# Altium PCB Booster_Common_Channel_RF.PcbDoc (part 3 of 3)
Units mm, origin at the board's own origin, x right, y up, seen from the top; angles counter-clockwise.
Board outline 159.2 x 28.7 mm, 2 copper layers (Top Layer, Bottom Layer), stack 1.071 mm thick; 192 components, 112 nets, 503 pads, 509 vias.
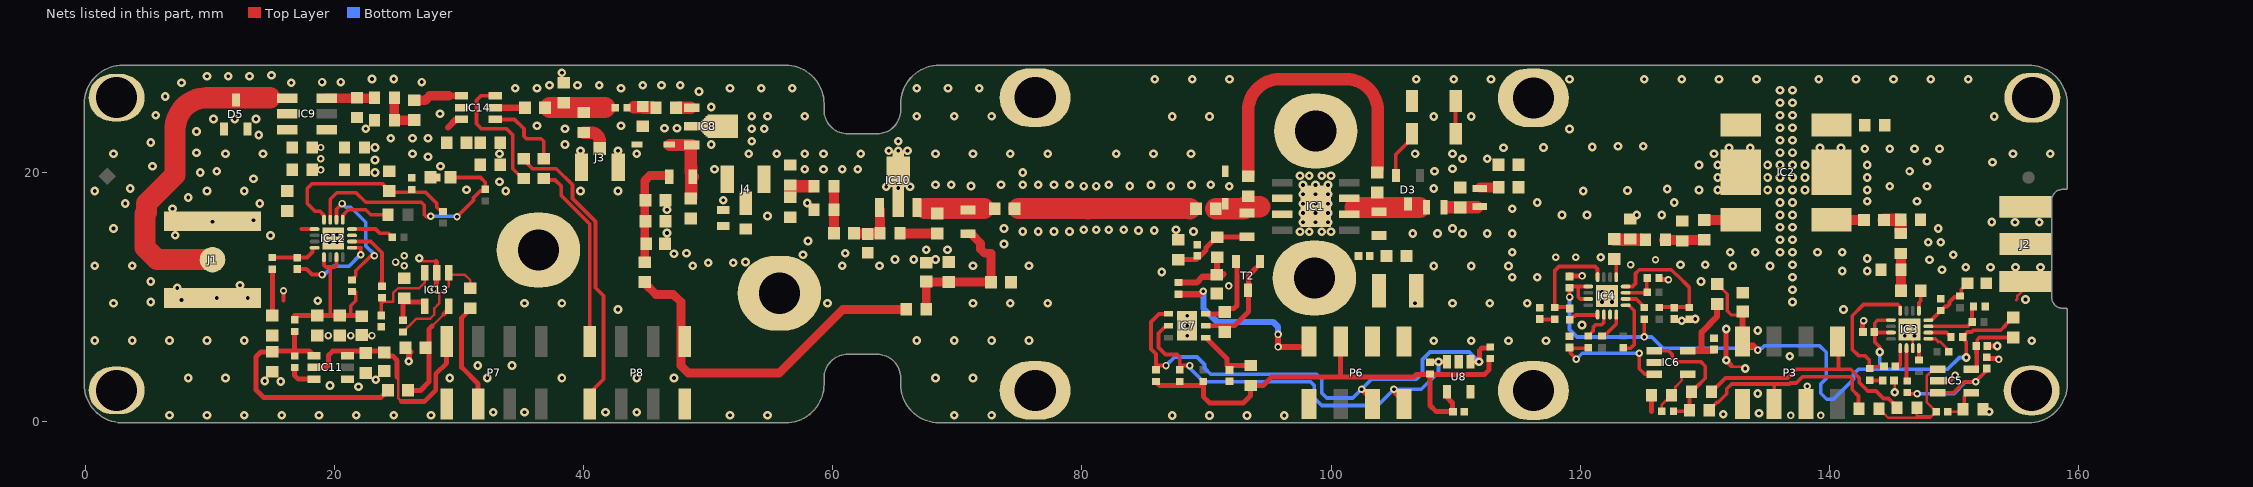
[diagram p2: the nets of this part, all layers, seen from the top]

## Via types
v1: diameter 0.7, hole 0.3, Top Layer to Bottom Layer, tented both sides, 449 vias
v2: diameter 0.6, hole 0.3, Top Layer to Bottom Layer, tented both sides, 60 vias

## Nets (pads, with @x,y where several pads share a name; then routed paths per layer and width w, separated by ;. In a path a pad name is that pad's centre, name@x,y a point inside that pad or via, vN(x,y) a via of type N, cw(c..) or ccw(c..) an arc to the next point about the centre after c; other vN are vias at no path point) (continued)
FWD_VRMS: P3.5 R17.2 R42.1 | length 17.4
  Top Layer w0.3: R17.2@130.372,0.866 130.447,0.941 R17.2@130.422,0.966 ; R17.2@130.372,0.916 130.977,1.521 131.09,1.521 131.77,2.2 131.77,2.603 132.165,2.998 135.488,2.998 ; P3.5@135.58,1.348 135.58,2.905 135.488,2.998 ; R42.1@142.35,0.968 142.35,2.033 141.85,2.533 141.85,3.397 141.674,3.572 137.854,3.572 137.35,3.068 136.89,3.068 136.82,2.998 135.488,2.998
GND: C2.1 C3.1 C4.1 C5.1 C6.1 C7.1 C8.1 C13.1 C14.1 C17.1 C18.1 C20.2 C21.1 C23.2 C24.1 C25.1 C26.1 C27.1 C29.1 C30.1 C31.1 C32.1 C33.1 C35.1 C36.1 C37.1 C43.1 C45.1 C46.1 C47.1 C51.2 C52.1 C53.1 C54.1 C55.1 C56.2 C57.1 C58.1 C59.1 C60.2 D1.1 D4.2 D5.1 D5.2 D6.1 IC1.9 IC2.2 IC2.3 IC2.6 IC2.7 IC3.11 IC3.17 IC4.11 IC4.17 IC5.2 IC6.2 IC7.2 IC7.7 IC8.2 IC9.2 IC10.2 IC10.4 IC11.1 IC12.11 IC12.17 IC13.2 IC14.2 J1.2 J2.2 J3.2 J4.2 L10.1 P3.3 P3.7 P6.7 P7.7 P8.1 pad.0 pad.1 pad.2 pad.3 pad.4 pad.5 pad.6 pad.7 R9.1 R13.1 R14.1 R15.1 R16.1 R21.1 R28.2 R31.1 R32.1 R40.2 R45.1 R46.1 R48.2 R49.2 R52.1 R53.1 R54.1 R56.2 R58.1 R59.1 R60.2 R61.2 R65.1 R68.1 R73.2 T2.1 T2.3 U8.2 U8.5 | length 28.6
  Top Layer w0.203: 27.039,12.83 28.148,12.83 28.15,12.828 ; 132.108,4.492 132.207,4.394 133.094,4.394 v1(133.25,4.238) ; v1(145.25,2.336) C20.2@145.25,3.268 ; IC3.11@146.7,5.918 IC3.17@146.7,7.118 ; 155,9.718 155.095,9.813 155.095,10.071 J2.2@155.75,10.725
  Top Layer w0.3: 15.9,9.678 v2(15.9,10.478)
  Top Layer w0.4: 28.148,10.978 28.2,11.03 28.2,12.778 28.15,12.828 ; IC7.2@89.95,7.668 92.25,7.668 93.379,8.797 93.379,11.697 93.65,11.968 93.65,11.985 94.283,12.618 T2.1@94.283,12.818 ; C17.1@119.15,11.768 119.25,11.668 v2(120.15,11.668) ; 125.73,0.773 R32.1@125.73,2.223 ; R9.1@126.281,11.498 126.411,11.368 v2(127.09,11.368) ; v1@131.75,7.438 v1(131.725,7.413) v1(131.725,4.899) 131.725,4.876 132.108,4.492 ; C14.1@142.65,7.168 142.65,7.968 v2(142.75,8.068) ; IC3.17@146.45,7.368 IC3.17@146.7,7.118 ; IC5.2@148.85,3.238 149.644,3.238 150.1,3.694 v2(150.097,3.694) ; C26.1@152.639,5.138 152.749,5.028 153.495,5.028 153.56,4.963 v2(153.61,4.963) ; C21.1@152.741,6.038 153.481,6.038 v1(153.491,6.048)
  Top Layer w0.5: v1(25.947,4.826) 25.985,4.864 25.985,5.453 C57.1@26.084,5.552
  other v1: 87.25,0.468 90.25,0.468 93.25,0.468 96.25,0.468 6.75,0.478 9.75,0.478 12.75,0.478 15.75,0.478 18.75,0.478 21.75,0.478 24.75,0.478 27.75,0.478 51.75,0.478 54.75,0.478 69.75,0.478 72.75,0.478 131.495,0.566 134.358,0.643 32.75,0.728 35.25,0.728 41.75,0.728 44.25,0.728 152.85,0.768 134.249,2.226 21.917,2.778 19.64,2.878 15.686,3.188 14.393,3.224 23.308,3.329 8.25,3.478 11.25,3.478 29.25,3.478 32.25,3.478 38.25,3.478 44.25,3.478 47.25,3.478 68.25,3.478 71.25,3.478 31.5,4.478 34.25,4.478 136.828,5.225 108.25,6.468 111.25,6.468 114.25,6.468 117.25,6.468 156.25,6.468 0.75,6.478 3.75,6.478 6.75,6.478 9.75,6.478 12.75,6.478 66.75,6.478 69.75,6.478 72.75,6.478 75.75,6.478 88.45,6.868 146.05,6.868 146.85,6.868 134.257,7.279 88.45,7.668 146.05,7.668 146.85,7.668 120.15,7.73 128.15,8.068 129.25,8.218 88.45,8.468 42.75,8.978 141.15,8.968 2.25,9.478 35.25,9.478 38.25,9.478 59.566,9.47 71.25,9.478 74.25,9.478 77.25,9.478 106.75,9.468 109.75,9.468 112.75,9.468 115.75,9.468 5.25,9.578 121.75,9.568 122.55,9.568 137.05,9.568 18.64,9.678 7.705,9.728 155.75,9.772 10.535,9.898 13.024,9.898 121.75,10.368 122.55,10.368 137.05,10.568 7.376,10.704 12.4,10.924 129.7,11.218 5.25,11.228 114.55,11.568 116.55,11.568 137.05,11.568 86.41,11.985 141.05,12.068 143.05,12.068 149.05,12.168 150.95,12.368 152.95,12.368 154.95,12.368 156.95,12.368 0.75,12.478 3.75,12.478 48.75,12.478 60.75,12.478 63.75,12.478 71.25,12.478 75.75,12.478 108.25,12.468 111.25,12.468 114.25,12.468 132.25,12.468 135.25,12.468 128.05,12.568 130.05,12.568 137.05,12.568 50,12.728 52,12.728 52.996,12.793 148.05,12.968 65,12.978 66.5,12.978 68.25,12.978 143.05,13.068 26.791,13.078 121.65,13.168 149.95,13.368 57.6,13.378 47.25,13.458 48.25,13.478 61,13.478 114.55,13.568 132.05,13.568 134.05,13.568 136.05,13.568 137.05,13.568 139.05,13.568 141.05,13.568 67.5,13.778 69.2,13.778 73.75,14.228 147.95,14.368 148.95,14.368 58,14.478 136.05,14.568 137.05,14.568 14.848,14.917 7.2,14.928 106.55,15.068 108.55,15.068 110.55,15.068 112.55,15.068 114.55,15.068 46.695,15.118 75.25,15.228 76.5,15.228 77.75,15.228 79,15.228 88.95,15.228 97.5,15.218 98.25,15.218 99.25,15.218 100,15.218 84.55,15.318 85.798,15.318 80.15,15.368 81.15,15.368 82.15,15.368 83.35,15.368 87.55,15.368 2.25,15.478 73.75,15.478 109.75,15.468 148.75,15.468 136.05,15.568 137.05,15.568 97.75,15.968 98.75,15.968 99.75,15.968 154.909,15.968 156.863,15.968 153.042,15.991 10.2,16.008 13.5,16.128 54.75,16.478 118.55,16.568 120.55,16.568 124.55,16.568 126.55,16.568 136.05,16.568 137.05,16.568 97.75,16.718 98.75,16.718 99.75,16.718 46.695,16.984 6.981,17.059 114.55,17.068 3.2,17.478 14,17.478 97.75,17.468 98.75,17.468 99.75,17.468 57.95,17.528 116.55,17.568 127.55,17.568 136.05,17.568 137.05,17.568 143.05,17.668 147.05,17.668 51.2,17.747 8.25,17.969 97.75,18.218 98.75,18.218 99.75,18.218 0.75,18.478 9.75,18.478 12.75,18.478 33.75,18.478 39.75,18.478 42.75,18.478 120.242,18.482 123.808,18.533 30.6,18.578 129.55,18.568 131.05,18.568 135.05,18.568 136.05,18.568 137.05,18.568 138.05,18.568 143.05,18.568 126.99,18.64 3.6,18.678 108.25,18.683 65.25,18.728 64.297,18.823 66.203,18.823 80.15,18.878 81.15,18.878 91.835,18.868 144.85,18.868 147.85,18.868 71.1,18.893 83.85,18.893 87.14,18.893 68.25,18.978 69.5,18.978 73.5,18.978 75.25,18.978 76.5,18.978 77.75,18.978 79,18.978 82.15,18.978 85.55,18.968 88.791,18.968 90.341,18.983 97.75,18.968 98.75,18.968 99.75,18.968 33.25,19.228 13.5,19.478 131.05,19.568 135.05,19.568 136.05,19.568 137.05,19.568 138.05,19.568 143.05,19.568 97.5,19.718 98.25,19.718 99.25,19.718 100,19.718 9.224,19.968 23.25,19.978 75.25,19.978 10.535,20.078 108.3,20.068 146.45,20.068 50.5,20.228 57.75,20.228 59.25,20.228 60.75,20.228 62,20.228 109.75,20.268 5.388,20.478 28.5,20.478 129.55,20.568 131.05,20.568 135.05,20.568 136.05,20.568 137.05,20.568 138.05,20.568 143.05,20.568 153.107,20.799 147.85,20.868 23.25,20.978 110.55,21.068 112.55,21.068 27.5,21.228 2.25,21.478 11.25,21.478 14.25,21.478 26.25,21.478 33.25,21.478 44.25,21.478 53.25,21.478 55.5,21.478 57.75,21.478 59.25,21.478 62.25,21.478 68.25,21.478 71.25,21.478 74.25,21.478 77.25,21.478 82.75,21.468 85.75,21.468 88.75,21.468 106.75,21.468 109.75,21.468 130.75,21.468 154.75,21.468 157.75,21.468 8.915,21.558 136.05,21.568 137.05,21.568 39.75,21.728 42.75,21.728 64.5,21.728 65.25,21.728 66,21.728 142.85,21.868 144.85,21.868 146.85,21.868 148.85,21.868 23.25,21.978 113.85,21.968 117.049,21.983 131.95,21.968 133.65,21.968 139.25,21.968 140.95,21.968 120.97,22.015 123.032,22.07 125.058,22.07 38.5,22.228 50.25,22.228 5.25,22.378 53.5,22.478 65.25,22.478 136.05,22.568 137.05,22.568 24.5,22.728 26.25,22.728 27.5,22.728 13.913,22.978 8.915,23.258 22.5,23.478 38.5,23.478 53.5,23.478 54.5,23.478 119.15,23.468 46.487,23.522 47.5,23.528 136.05,23.568 137.05,23.568 36.25,23.728 43,23.728 50.25,23.728 10.286,24.263 11.986,24.263 13.686,24.263 87.25,24.468 90.25,24.468 108.25,24.468 111.25,24.468 153.25,24.468 53.5,24.478 54.75,24.478 57.75,24.478 66.75,24.478 69.75,24.478 72.75,24.478 5.641,24.557 136.05,24.568 137.05,24.568 28.466,24.678 50.25,25.228 136.05,25.568 137.05,25.568 6.407,26.075 49.25,26.478 136.05,26.568 137.05,26.568 34.5,26.728 36.25,26.728 43,26.728 51.75,26.728 54.25,26.728 56.75,26.728 66.75,26.728 69.25,26.728 71.75,26.728 37.25,26.978 39.5,26.978 41.25,26.978 44.75,26.978 46.25,26.978 47.75,26.978 7.705,27.172 16.526,27.185 19,27.228 20.5,27.228 27,27.228 85.85,27.468 88.85,27.468 91.85,27.468 106.85,27.468 109.85,27.468 112.85,27.468 119.15,27.468 125.15,27.468 128.15,27.468 131.15,27.468 134.15,27.468 139.15,27.468 142.15,27.468 145.15,27.468 148.15,27.468 151.15,27.468 23,27.478 24.75,27.478 9.764,27.693 11.464,27.693 13.164,27.693 14.929,27.776 38.25,27.978
  other v2: 136.912,0.468 139.31,0.468 138.24,2.808 19.5,6.878 21.3,6.878 23,6.878 28,10.612 91.798,10.868 25.6,12.478 124.05,12.568 24.9,12.778 126.05,12.968 118.05,13.168 119.65,13.168 25.6,13.278 19.6,14.378 20.2,14.378 19.6,14.978 20.2,14.978 18.9,20.178 18.9,21.078 18.9,21.978
NetC1_1: C1.1 R5.2 | length 23
  Top Layer w1: R5.2@93.35,19.868 93.35,24.928 cw(c95.89,24.928) 95.89,27.468 101.21,27.468 cw(c101.21,24.928) 103.75,24.928 C1.1@103.75,20.268
NetC1_2: C1.2 D3.3 IC1.6 IC1.7 L3.1 L6.1 | length 5.2
  Top Layer w1.7: 101.95,17.172 103.85,17.172 106.18,17.172 107.114,17.172
NetC2_2: C2.2 R1.1 R4.1 | length 5.3
  Top Layer w0.5: R1.1@87.75,11.138 89.215,11.138 89.67,11.593 91.125,11.593 91.35,11.818 ; C2.2@90.819,11.768 90.834,11.784 90.834,13.152 R4.1@90.85,13.168
NetC3_2: C3.2 C4.2 L2.1 R4.2 | length 6.1
  Top Layer w0.4: C4.2@87.75,12.968 C3.2@89.207,12.968 ; C3.2@89.384,13.145 89.967,13.728 89.967,13.935 R4.2@90.8,14.768 ; R4.2@90.85,14.768 90.875,14.793 93.225,14.793 L2.1@93.25,14.818
NetC9_1: C9.1 L7.2 | length 1.5
  Top Layer w0.8: L7.2@111.946,18.778 113.44,18.778 C9.1@113.45,18.768
NetC9_2: C9.2 C37.2 IC2.8
NetC10_1: C10.1 R10.2 R14.2 | length 2
  Top Layer w1: C10.1@144.383,16.168 R14.2@145.55,16.168 ; R10.2@145.75,15.268 R14.2@145.75,16.068
NetC10_2: C10.2 IC2.4 | length 2.3
  Top Layer w0.8: IC2.4@140.24,16.158 140.24,16.168 C10.2@142.531,16.168
NetC11_1: C11.1 R11.1 R15.2 | length 3.2
  Top Layer w0.8: R11.1@126.75,14.568 128.05,14.568 C11.1@129.95,14.568
NetC11_2: C11.2 IC2.5 | length 3
  Top Layer w0.8: C11.2@129.95,16.168 132.95,16.168 IC2.5@132.95,16.158
NetC12_1: C12.1 J2.1
NetC12_2: C12.2 IC2.1
NetC15_1: C15.1 IC3.1 | length 1.7
  Top Layer w0.3: IC3.1@147.2,8.818 147.2,9.518 147.35,9.668 C15.1@147.35,10.468
NetC15_2: C15.2 R10.1 R13.2 | length 3
  Top Layer w0.8: C15.2@145.75,10.468 R13.2@145.75,12.168 R10.1@145.75,13.468
NetC16_1: C16.1 IC4.1 | length 1.2
  Top Layer w0.3: C16.1@122.85,12.668 122.9,12.618 IC4.1@122.9,11.518
NetC16_2: C16.2 R11.2 R16.2 | length 2.1
  Top Layer w1: C16.2@122.732,14.574 124.012,14.574 R11.2@124.848,14.574
NetC19_1: C19.1 IC3.9 | length 1.6
  Top Layer w0.3: C19.1@145.55,4.368 145.7,4.518 IC3.9@145.7,5.918
NetC19_2: C19.2 IC3.4 R26.1 | length 10.9
  Top Layer w0.3: C19.2@144.35,4.368 143.218,4.368 143.218,4.899 142.85,5.268 142.35,5.268 141.85,5.768 141.85,8.468 142.75,9.368 145.5,9.368 145.7,9.168 145.7,8.818 IC3.4@145.7,8.618
NetC20_1: C20.1 R26.2 | length 0.8
  Top Layer w0.3: R26.2@143.45,3.268 C20.1@144.25,3.268
NetC21_2: C21.2 IC5.5 L1.1 | length 7.7
  Top Layer w0.3: IC5.5@151.4,4.188 IC5.5@151.72,4.188 ; IC5.5@151.65,4.118 IC5.5@151.72,4.188 ; C21.2@151.75,5.968 151.75,5.499 151.8,5.449 151.8,5.205 ; L1.1@154.754,6.728 154.744,6.718 152.051,6.718 151.875,6.542 151.875,5.968 151.875,5.499 151.875,5.205 ; IC5.5@151.72,4.188 151.725,4.188 151.875,4.338 151.875,5.205 ; IC5.5@151.72,4.188 151.8,4.268 151.8,5.205 ; 151.8,5.205 151.875,5.205
NetC22_1: C22.1 IC4.9 | length 2.4
  Top Layer w0.3: C22.1@119.156,8.158 119.443,8.446 119.591,8.446 119.672,8.527 IC4.9@121.4,8.527
NetC22_2: C22.2 IC4.4 R27.1 | length 8.5
  Top Layer w0.3: C22.2@119.15,9.168 117.95,9.168 117.95,12.068 118.3,12.418 121.2,12.418 121.4,12.218 IC4.4@121.4,11.518
NetC23_1: C23.1 R27.2 | length 1.2
  Top Layer w0.3: C23.1@116.75,8.168 R27.2@117.95,8.168
NetC24_2: C24.2 IC6.5 L4.1 | length 6.5
  Top Layer w0.5: IC6.5@128.5,5.668 129.75,5.668 ; C24.2@130.75,5.718 130.7,5.668 129.75,5.668 ; L4.1@130.996,9.408 130.996,8.424 130.4,7.828 130.4,7.796 129.75,7.146 129.75,5.668
NetC25_2: C25.2 IC4.16 R24.2 R28.1 | length 10.8
  Top Layer w0.3: IC4.16@123.6,10.818 124.2,10.818 124.45,11.068 124.45,11.868 124.75,12.168 127.319,12.168 127.719,11.768 127.75,11.768 128.75,10.768 128.75,9.168 127.55,9.168 R24.2@126.35,9.168
NetC26_2: C26.2 IC5.3 R29.1 | length 10.8
  Top Layer w0.3: R29.1@146.25,2.268 146.3,2.218 v2(147.05,2.218) ; IC5.3@148.7,2.288 149.982,2.288 150.862,3.168 v2(151.75,3.168) 151.75,3.185 152.639,4.075 C26.2@152.639,4.238
  Bottom Layer w0.3: v2(147.05,2.218) 150.015,2.218 150.965,3.168 v2(151.75,3.168)
NetC27_2: C27.2 IC6.3 R30.1 | length 10.7
  Top Layer w0.3: C27.2@119.15,5.868 R30.1@120.65,5.868 ; C27.2@119.15,5.918 119.232,5.836 119.232,5.458 v2(119.696,4.994) ; v2(124.75,5.468) 124.75,4.218 125.2,3.768 IC6.3@126.1,3.768
  Bottom Layer w0.3: v2(119.696,4.994) 120.17,5.468 v2(124.75,5.468)
NetC28_1: C28.1 R8.2 R46.2 | length 3.9
  Top Layer w1: 44.006,25.228 C28.1@45.506,25.228 ; R46.2@44.8,25.178 C28.1@45.6,25.178 ; R46.2@44.8,25.178 C28.1@45.6,25.178 ; R46.2@44.8,25.178 C28.1@45.6,25.178
NetC28_2: C28.2 IC8.1 | length 0.9
  Top Layer w1: C28.2@47.7,25.178 IC8.1@48.6,25.178
NetC29_2: C29.2 IC7.1 R33.1 | length 4.9
  Top Layer w0.4: IC7.1@89.95,6.728 91.65,5.028 91.65,4.468 R33.1@93.55,4.468
NetC30_2: C30.2 IC3.16 R20.2 R40.1 | length 4.9
  Top Layer w0.3: IC3.16@147.9,8.118 IC3.16@147.95,8.118 148.2,8.118 R40.1@149.05,8.968 ; R40.1@148.95,8.968 R40.1@149.05,8.968 ; R20.2@150.45,10.057 150.45,9.968 150.05,9.968 149.653,9.571 149.653,9.422 149.446,9.215 149.297,9.215 R40.1@149.05,8.968 ; R20.2@150.5,10.057 150.598,10.155 150.598,10.575 C30.2@151.1,11.078
NetC31_2: C31.2 C32.2 C33.2 L8.2 L9.1 | length 8.7
  Top Layer w0.7: L8.2@44.896,12.768 44.896,14.978 44.896,16.778 44.896,17.743 44.896,18.243 44.896,19.318 45.306,19.728 L9.1@46.86,19.728
NetC34_1: C34.1 R47.2 R49.1 | length 3.4
  Top Layer w0.76: R47.2@24.8,25.978 R49.1@24.8,24.178 C34.1@26.4,24.178
NetC34_2: C34.2 IC14.1 | length 3.5
  Top Layer w0.5: 29.15,26.128 IC14.1@30.2,26.128
  Top Layer w0.76: C34.2@26.8,25.778 27.289,25.778 27.639,26.128 29.15,26.128
NetC35_2: C35.2 IC7.3 T2.2 | length 6.3
  Top Layer w0.4: IC7.3@89.95,8.608 C35.2@91.45,8.608 ; C35.2@91.45,8.768 91.725,9.043 92.201,9.043 92.45,9.292 92.45,12.751 T2.2@92.383,12.818
NetC36_2: C36.2 L6.2 L7.1 | length 2.4
  Top Layer w1: L6.2@109.34,17.172 110.146,17.172 110.15,17.168 110.154,17.172 L7.1@111.75,17.172
NetC38_1: C38.1 D1.2 IC1.2 IC1.3 L2.2 R5.1 | length 3.6
  Top Layer w1.7: C38.1@90.75,17.068 91.25,17.068 93,17.068 93.15,17.218 94.275,17.218
NetC38_2: C38.2 C50.2 | length 19.4
  Top Layer w1.7: C50.2@74.9,17.078 77.7,17.078 ; 80.5,17.068 76.3,17.078 88.65,17.068
NetC39_1: C39.1 IC14.5 | length 2.5
  Top Layer w0.3: C39.1@35.25,25.128 C39.1@35.3,25.178
  Top Layer w0.5: IC14.5@32.9,25.178 C39.1@35.3,25.178
NetC39_2: C39.2 R8.1 R45.2 R50.2 | length 4.4
  Top Layer w1.7: C39.2@37.3,25.178 41.7,25.178
NetC40_1: C40.1 D6.2 IC8.3 L9.2 | length 6.2
  Top Layer w1: D6.2@46.921,22.178 IC8.3@48.675,22.178 ; L9.2@48.6,19.978 IC8.3@48.6,21.978 ; C40.1@48.65,17.928 48.65,19.528 48.75,19.628 L9.2@48.76,19.628 ; L9.2@48.65,19.728 48.65,20.378
NetC40_2: C40.2 C41.1 L10.2 R51.2
NetC41_2: C41.2 R57.1 R60.1 | length 2.3
  Top Layer w1: C41.2@56.6,18.228 56.6,18.878 R57.1@58.25,18.878
NetC42_1: C42.1 R52.2 R56.1
NetC42_2: C42.2 IC14.3 | length 1.4
  Top Layer w0.5: 29.1,23.578 29.75,24.228 IC14.3@30.2,24.228
NetC43_2: C43.2 C49.2 IC10.1 R55.1 | length 4
  Top Layer w0.8: C49.2@61.7,15.078 62.8,15.078 R55.1@63.8,15.078 IC10.1@63.8,16.978
NetC44_1: C44.1 R55.2 | length 3
  Top Layer w0.8: R55.2@65.4,15.078 C44.1@68.4,15.078
NetC44_2: C44.2 C50.1 IC10.3 L5.2 | length 4.7
  Top Layer w1.7: 67.4,17.078 72.137,17.078
NetC45_2: C45.2 C46.2 C47.2 L5.1 L11.1 | length 12.5
  Top Layer w0.7: L11.1@67.51,8.974 67.5,8.984 67.5,11.178 C46.2@69.3,11.178 C45.2@72.7,11.178 72.7,13.478 72.209,13.478 71.862,13.825 71.862,14.295 71.104,15.053 L5.1@70.854,15.053
NetC48_1: C48.1 IC12.1 | length 1.1
  Top Layer w0.3: 17.35,15.428 IC12.1@18.45,15.428
NetC48_2: C48.2 IC9.1 R58.2 R59.2
NetC49_1: C49.1 R57.2 R61.1 | length 3.8
  Top Layer w0.8: C49.1@60.1,15.078 R57.2@60.1,18.878
NetC56_1: C56.1 IC12.15 R65.2 R66.2 | length 20.2
  Top Layer w0.3: IC12.15@19.65,16.128 IC12.15@19.65,16.178 19.65,17.828 20.175,18.353 21.725,18.353 22.5,17.578 26.954,17.578 27.196,17.336 27.196,16.608 27.378,16.426 27.692,16.426 v2(27.718,16.452) v2@27.744,16.478 ; C56.1@29.3,19.578 31.717,19.578 32.1,19.194 R66.2@32.1,18.628 31.96,18.488 31.694,18.488 31.15,17.944 31.15,17.747 v2(29.829,16.426)
  Bottom Layer w0.3: v2(27.718,16.452) 29.803,16.452 v2(29.829,16.426)
NetC57_2: C57.2 IC13.5 L12.1 | length 8.9
  Top Layer w0.2: 27.841,7.644 28.824,8.628 28.8,8.628
  Top Layer w0.4: L12.1@25.91,2.474 26.895,2.474 27.579,3.159 27.579,4.028 27.579,7.368 27.572,7.376 27.841,7.644 ; 28.8,8.628 29.15,8.978 IC13.5@29.15,9.378
NetC58_2: C58.2 IC12.16 R69.2 R73.1 | length 15.2
  Top Layer w0.3: IC12.16@19.15,16.128 IC12.16@19.15,16.178 19.15,16.528 18.825,16.853 18.425,16.853 17.8,17.478 17.8,18.678 18.2,19.078 23.8,19.078 C58.2@24.4,18.478 ; C58.2@24.4,18.378 27.309,18.378 28.209,17.478 28.209,17.179 R69.2@28.455,16.933
NetC59_2: C59.2 IC13.3 R74.1 | length 6.3
  Top Layer w0.2: 23.8,9.578 24.7,9.578 24.7,10.285 25.093,10.678 26.787,10.678 27.25,11.141 IC13.3@27.25,11.778
  Top Layer w0.3: C59.2@23.75,8.478 C59.2@23.75,8.488 23.75,9.528 23.8,9.578
  Top Layer w0.4: 23.793,9.578 23.8,9.578
NetC60_1: C60.1 R75.1 | length 3.4
  Top Layer w0.4: C60.1@15,8.478 15,11.878
NetC61_1: C61.1 IC12.9 | length 7.3
  Top Layer w0.3: C61.1@17,12.228 17.735,12.228 18.185,11.778 v2(19,11.778) ; IC12.9@21.35,13.928 22.15,13.928 22.1,13.878 v2(22.1,13.378)
  Bottom Layer w0.3: v2(19,11.778) 19.2,11.778 19.869,12.447 21.15,12.447 22.081,13.378 v2(22.1,13.378)
NetC61_2: C61.2 IC12.4 R75.2 | length 4
  Top Layer w0.3: R75.2@15,13.148 17.788,13.148 18.235,13.595 18.235,13.928 IC12.4@18.4,13.928 IC12.4@18.45,13.928
NetD2_1: D2.1 D3.2 | length 3.8
  Top Layer w0.3: D3.2@105.202,19.857 105.202,21.41 105.721,21.928 106.5,22.708 D2.1@106.5,23.083
NetD2_2: D2.2 D4.1 | length 2.6
  Top Layer w0.3: D2.2@110,23.083 D4.1@110,25.718
NetD5_3: D5.3 IC9.3 J1.1 | length 25.4
  Top Layer w1.7: J1.1@10.2,12.978 5.741,12.978 4.778,13.941 4.778,16.652 4.9,16.774 4.9,17.478 7.2,19.778 7.2,23.438 cw(c9.74,23.438) 9.74,25.978 12.074,25.978 14.817,25.978
NetIC3_10: IC3.10 R29.2 | length 2.7
  Top Layer w0.3: R29.2@146.2,3.268 IC3.10@146.2,5.918 ; R29.2@146.25,3.268 R29.2@146.3,3.318
NetIC3_12: IC3.12 R25.2 | length 1
  Top Layer w0.3: IC3.12@147.2,5.918 147.2,5.118 R25.2@147.35,4.968
NetIC3_13: IC3.13 R38.2 | length 2.2
  Top Layer w0.203: 148.741,6.377 148.923,6.377 149.411,5.889 149.411,5.766 R38.2@149.599,5.578
  Top Layer w0.3: IC3.13@147.9,6.618 148.5,6.618 148.741,6.377
NetIC3_14: IC3.14 R18.2 | length 1.7
  Top Layer w0.3: IC3.14@147.9,7.118 149.4,7.118 R18.2@149.55,6.968
NetIC3_15: IC3.15 R7.1 R21.2 | length 4.8
  Top Layer w0.3: IC3.15@147.9,7.618 151.1,7.618 151.45,7.968 151.45,9.028 R21.2@151.49,9.068
NetIC4_10: IC4.10 R30.2 | length 2.6
  Top Layer w0.3: R30.2@120.65,6.868 120.7,6.868 120.81,6.978 120.81,7.028 121.06,7.278 121.06,7.567 121.236,7.743 121.724,7.743 121.9,7.919 IC4.10@121.9,8.618
NetIC4_12: IC4.12 R37.2 | length 2.2
  Top Layer w0.3: R37.2@121.85,6.868 121.95,6.868 122.9,7.818 IC4.12@122.9,8.618
NetIC4_13: IC4.13 R39.2 | length 4.7
  Top Layer w0.3: R39.2@123.45,5.868 124.05,5.868 124.35,6.168 124.35,8.868 123.9,9.318 IC4.13@123.6,9.318
NetIC4_14: IC4.14 R19.1 | length 1.8
  Top Layer w0.3: IC4.14@123.6,9.818 124.5,9.818 R19.1@125.15,9.168
NetIC4_15: IC4.15 R2.1 R9.2 | length 2.8
  Top Layer w0.3: IC4.15@123.6,10.318 125.3,10.318 125.35,10.368 125.35,11.328 R9.2@125.39,11.368
NetIC5_1: IC5.1 R22.1 R41.2 R42.2 | length 12.5
  Top Layer w0.203: R42.2@143.985,1.02 143.985,0.97 144.333,0.622 144.383,0.622 144.737,0.268 148.08,0.268 148.222,0.41 ; R41.2@147.033,1.096 147.033,0.41 148.222,0.41 ; IC5.1@148.85,4.188 IC5.1@148.7,4.188 148.375,4.188 IC5.1@148.177,3.99 ; IC5.1@149.1,4.118 148.63,4.118 148.502,3.99 IC5.1@148.177,3.99 ; IC5.1@148.177,3.99 147.979,3.792 147.97,3.792 147.821,3.643 147.821,1.547 148.58,0.788 R22.1@148.58,0.768 148.58,0.748 148.392,0.56 148.372,0.56 148.222,0.41
NetIC5_4: IC5.4 R22.2 R31.2 | length 3.3
  Top Layer w0.203: R22.2@149.52,0.768 150.54,0.768 R31.2@150.741,0.969
  Top Layer w0.3: R31.2@150.829,0.969 150.829,1.962 150.925,2.058 150.925,2.138 151.005,2.218 IC5.4@151.65,2.218
NetIC6_1: IC6.1 R12.1 R17.1 R23.1 | length 10.5
  Top Layer w0.3: IC6.1@126.1,5.668 127.1,5.668 127.4,5.368 127.4,5.132 127.764,4.768 129.7,4.768 130.05,4.418 130.05,3.458 129.3,2.708 129.25,2.708 128.95,2.408 R12.1@128.95,2.358 128.772,2.18 R17.1@128.772,1.112 ; R23.1@127.486,0.8 128.706,0.8 R17.1@128.772,0.866 R17.1@128.772,1.112 ; R17.1@128.528,0.869 R17.1@128.772,1.112 ; R17.1@128.828,1.219 128.828,1.169 R17.1@128.772,1.112
NetIC6_4: IC6.4 R23.2 R32.2 | length 4.1
  Top Layer w0.203: R23.2@126.546,0.8 126.546,1.322 126.932,1.708 126.982,1.708 127.33,2.056 R32.2@127.33,2.106 127.647,2.422 127.647,2.765 128.175,3.293 128.175,3.57 128.374,3.768 IC6.4@128.65,3.768
  Top Layer w0.3: R32.2@127.03,2.106 R32.2@127.08,2.156
NetIC9_4: IC9.4 R47.1 R48.1 | length 3.8
  Top Layer w0.76: IC9.4@19.39,25.948 23.17,25.948 R47.1@23.2,25.978
NetIC9_6: IC9.6 R53.2 R54.2
NetIC11_6: IC11.6 R62.1 | length 2.4
  Top Layer w0.4: R62.1@16.8,4.308 16.8,3.659 17.083,3.376 IC11.6@18.35,3.376 IC11.6@18.4,3.376
NetIC12_10: IC12.10 R74.2 | length 5.2
  Top Layer w0.3: IC12.10@21.35,14.428 22.902,14.428 23.802,13.527 23.802,11.18 23.8,11.178 23.75,11.228
NetIC12_12: IC12.12 R71.2 | length 3.5
  Top Layer w0.3: IC12.12@21.35,15.428 IC12.12@21.4,15.428 23.294,15.428 23.618,15.104 24.305,15.104 R71.2@24.6,14.809
NetIC12_13: IC12.13 R72.1 | length 4.4
  Top Layer w0.3: IC12.13@20.65,16.128 20.65,16.528 21.1,16.978 22.5,16.978 22.9,16.578 R72.1@24.3,16.578
NetIC12_14: IC12.14 R64.2 | length 9.8
  Top Layer w0.3: IC12.14@20.15,16.128 20.15,17.028 v2(20.6,17.478) ; R64.2@21.4,11.378 21.7,11.678 21.7,12.078 22.9,13.278 v2(23.2,13.278)
  Bottom Layer w0.3: v2(20.6,17.478) 20.9,17.178 21.3,17.178 22.5,15.978 22.5,14.078 v2@23.2,13.378
NetIC13_1: IC13.1 R67.1 R70.1 | length 9.4
  Top Layer w0.2: R67.1@25.5,7.178 25.894,7.572 25.915,7.572 26.062,7.72 26.062,7.74 26.566,8.244 27.682,8.244 28,8.562 28,9.068 28.4,9.468 28.4,10.194 28.634,10.428 28.741,10.428 29.15,10.836 29.15,11.778 30.445,11.778 30.9,11.323 R70.1@30.9,10.678
NetIC13_4: IC13.4 R67.2 R68.2 | length 3
  Top Layer w0.4: 25.5,8.478 25.5,9.478 25.6,9.578 26.95,9.578 IC13.4@27.3,9.228
NetIC14_4: IC14.4 R44.1 | length 6
  Top Layer w0.3: IC14.4@32.9,24.228 34.45,24.228 35.2,23.478 35.2,22.878 35.4,22.678 36.6,22.678 36.8,22.478 R44.1@36.8,21.478
NetIC14_6: IC14.6 R43.1 | length 10.4
  Top Layer w0.3: IC14.6@32.5,26.128 31.75,26.128 31.4,25.778 31.4,23.878 31.8,23.478 33.8,23.478 34.3,22.978 34.3,20.278 R43.1@35.2,19.378
NetJ3_1: J3.1 R50.1 | length 2.1
  Top Layer w1: R50.1@40,23.178 40.6,23.178 cw(c40.6,22.478) 41.3,22.478 ; J3.1@41.3,21.903 J3.1@41.3,22.278
NetJ4_1: J4.1 R51.1
NetP7_5: P7.5 R70.2 | length 8.4
  Top Layer w0.4: R70.2@30.9,9.078 30.9,8.998 30.2,8.298 30.2,4.326 31.53,2.996 P7.5@31.53,1.478
OUT_BIAS: P6.8 R1.2 | length 14.4
  Top Layer w0.5: R1.2@87.75,10.198 89.485,10.198 89.723,10.436 v2(89.75,10.436) ; v2(95.75,6.968) v2(95.75,5.968) 97.44,5.968
  Bottom Layer w0.5: v2(89.75,10.436) 89.75,9.068 90.85,7.968 95.35,7.968 95.75,7.568 v2(95.75,6.968) v2(95.75,5.968)
P3V3: C13.2 P6.6 R3.1 R6.1 R33.2 R34.1 R35.1 R36.1 U8.4 | length 39.2
  Top Layer w0.4: R35.1@85.95,3.168 86.25,2.868 89.75,2.868 89.75,1.968 90.25,1.468 92.95,1.468 93.55,2.068 R33.2@93.55,2.868 94.55,2.868 95.25,3.568 100.75,3.568 ; P6.6@100.75,5.968 100.75,3.568 ; U8.4@109.3,2.368 109.3,1.918 109.75,1.468 109.75,0.768 108.45,0.768 107.95,1.268 R3.1@107.95,3.768 ; R6.1@112.775,5.028 112.699,4.953 112.699,4.138 112.329,3.768 R3.1@107.95,3.768 ; 100.75,3.568 106.65,3.568 106.85,3.768 R3.1@107.95,3.768
P3V3A: C51.1 IC11.4 L12.2 R62.2 R63.1 | length 20
  Top Layer w0.4: 16.8,6.878 16.8,5.628 15.05,5.628 C51.1@15,5.578 14.1,5.578 13.691,5.169 13.691,2.519 14.293,1.917 23.733,1.917 L12.2@24.29,2.474 ; 16.825,5.603 16.85,5.628 17.998,5.628 IC11.4@18.35,5.276
P3V3A1: C8.2 C14.2 C17.2 IC3.5 IC3.7 IC4.5 IC4.7 L1.2 L4.2 P3.8 R18.1 R19.2 | length 67.5
  Top Layer w0.254: L4.2@130.996,11.028 131.804,10.22 131.804,8.864 132.135,8.533 133.04,8.533 C8.2@133.05,8.543
  Top Layer w0.3: v2(119.15,9.968) C17.2@119.15,10.718 119.15,10.768 119.2,10.818 119.85,10.818 ; IC4.7@120.7,9.818 IC4.7@120.65,9.818 120,9.818 119.85,9.968 119.85,10.818 ; IC4.5@120.7,10.818 IC4.5@120.65,10.818 119.85,10.818 ; v2(125.15,6.768) R19.2@125.15,8.168 ; v1(144.05,5.568) 144.05,5.968 143.65,6.368 C14.2@143.65,7.168 ; IC3.7@145,7.118 IC3.7@144.95,7.118 143.7,7.118 C14.2@143.65,7.168 ; IC3.5@145,8.118 IC3.5@144.95,8.118 143.9,8.118 143.65,7.868 C14.2@143.65,7.168 ; R18.1@150.72,6.768 150.72,6.788 151.098,7.166 151.428,7.166 151.577,7.315 153.727,7.315 153.771,7.315 154.153,7.697 154.153,7.741 L1.2@154.75,8.338 ; R18.1@150.86,6.778 150.86,6.51 151,6.37 v1(151,5.118)
  Top Layer w0.5: C8.2@133.04,8.533 133.04,6.068 133.9,6.068 v2(134.25,5.718)
  Bottom Layer w0.3: v2(119.15,9.968) 119.15,7.368 119.75,6.768 v2(125.15,6.768) 125.75,6.768 126.65,5.868 134.599,5.868 134.799,6.068 139.226,6.068 139.75,5.544 139.75,3.427 139.31,2.987 139.31,2.247 139.789,1.768 140.35,1.768 141.95,3.368 141.95,3.768 142.35,4.168 144.05,4.168 ; v1(144.05,5.568) 144.05,4.168 ; v1(151,5.118) 150.45,5.118 149.5,4.168 144.05,4.168
P3V3ADL: C53.2 C54.2 C55.2 IC12.5 IC12.7 R63.2 R64.1 | length 13.9
  Top Layer w0.3: IC12.5@19.15,13.228 19.15,12.528 19.3,12.378 19.65,12.378 ; 19.7,8.478 19.65,8.528 19.65,12.378 ; IC12.7@20.15,13.228 20.15,12.528 20,12.378 19.65,12.378 ; 21.3,8.478 21.3,9.278 21.7,9.678 R64.1@21.7,10.378
  Top Layer w0.4: 16.8,8.478 C53.2@18.6,8.478 19.7,8.478 C54.2@20.4,8.478 21.3,8.478 C55.2@22.2,8.478
RET_VRMS: P3.2 R12.2 R41.1 | length 19.1
  Top Layer w0.3: R12.2@130.55,2.358 130.55,2.408 130.85,2.708 130.9,2.708 131.66,3.468 136.65,3.468 137.35,4.168 140.75,4.168 ; P3.2@140.66,6.068 140.75,5.978 140.75,4.168 ; R41.1@145.433,1.096 145.433,1.146 144.756,1.823 144.36,1.823 143.758,2.425 143.096,2.425 142.407,3.113 142.407,3.479 141.719,4.168 140.75,4.168
SCK: IC7.4 P6.3 R6.2 R35.2 U8.1 | length 40.1
  Top Layer w0.3: v2(86.75,4.468) 85.95,4.468 85.95,5.406 85.55,5.806 85.55,7.968 86.19,8.608 IC7.4@86.95,8.608
  Top Layer w0.4: v2@102.52,2.498 P6.3@103.45,1.568 ; U8.1@111.2,4.768 v1(111.875,4.768) 111.932,4.825 111.932,5.699 112.112,5.878 112.685,5.878 R6.2@112.775,5.968
  Bottom Layer w0.3: v2(86.75,4.468) 87.45,5.168 89.25,5.168 89.85,4.568 89.85,4.268 90.35,3.768 98.85,3.768 99.25,3.368 99.25,2.268 99.65,1.868 101.75,1.868 v2(102.45,2.568) 103.25,3.368 106.85,3.368 107.35,3.868 107.35,4.968 107.95,5.568 111.075,5.568 v1(111.875,4.768)
SDA: IC7.5 P6.1 R3.2 R34.2 U8.3 | length 32.6
  Top Layer w0.3: IC7.5@86.95,7.668 86.75,7.668 86.15,7.068 86.15,5.918 86.7,5.368 87.65,5.368 87.85,5.168 87.85,4.468 v2(88.65,4.468)
  Top Layer w0.4: v2(105.05,2.568) 105.06,2.558 105.06,2.358 P6.1@106.05,1.368 ; R3.2@107.95,4.768 v1(108.625,4.768) U8.3@109.3,4.768
  Bottom Layer w0.3: v2(88.65,4.468) 88.65,4.268 89.75,3.168 98.35,3.168 98.65,2.868 98.65,1.868 99.25,1.268 103.75,1.268 v2(105.05,2.568) 107.25,2.568 108.625,3.943 v1(108.625,4.768)
SW_RF_A: P8.8 R44.2 | length 15
  Top Layer w0.3: R44.2@36.8,19.378 37.7,19.378 38.2,18.878 38.2,18.132 40.49,15.842 P8.8@40.49,6.478
SW_RF_B: P8.7 R43.2 | length 23.8
  Top Layer w0.3: R43.2@35.2,21.078 35.45,20.828 35.45,20.726 35.898,20.278 37.8,20.278 39.098,18.98 39.098,17.874 40.942,16.029 40.942,10.726 41.6,10.068 41.6,3.378 40.49,2.268 P8.7@40.49,1.478
VCC_PREAMP: L8.1 L11.2 P8.2 | length 29.1
  Top Layer w0.7: L8.1@44.896,11.082 45.8,10.178 47.2,10.178 47.81,9.568 47.81,6.478 47.81,4.468 48.4,3.878 55.7,3.878 60.796,8.974 L11.2@65.89,8.974
VCC_PREAMP_1: C18.2 C52.2 IC11.3 IC11.5 P7.8 | length 18.9
  Top Layer w0.203: 25.017,3.559 25.1,3.477 25.1,1.854 25.376,1.578
  Top Layer w0.381: 25.376,1.578 27.2,1.578 28.122,2.5 28.122,3.8 28.99,4.668 P7.8@28.99,6.478
  Top Layer w0.4: IC11.5@18.4,4.326 19.347,4.326 19.5,4.479 19.5,5.278 19.85,5.628 22.5,5.628 23.95,5.628 24,5.578 24,5.553 24.3,5.253 24.66,5.253 25.017,4.896 25.017,3.559
VCC_PWRAMP: C5.2 C6.2 C7.2 L3.2 P6.2 P6.4
pads on no net: D3.1 FTG1.FTG2 FTG2.1 IC1.1 IC1.4 IC1.5 IC1.8 IC3.2 IC3.3 IC3.6 IC3.8 IC4.2 IC4.3 IC4.6 IC4.8 IC9.5 IC11.2 IC12.2 IC12.3 IC12.6 IC12.8 P7.2 P7.4 P8.3 P8.4 P8.5 P8.6

## Polygon pours and split planes (outlines as drawn)
GND on Bottom Layer "Bottom Layer-GND" (solid, remove dead copper, pour order 9): 79.5,-0.282 156,-0.282 ccw(c156,2.718) 159,2.718 159,8.968 158.75,8.968 cw(c158.75,9.968) 157.75,9.968 157.75,16.968 cw(c158.75,16.968) 158.75,17.968 159,17.968 159,25.718 ccw(c156,25.718) 156,28.718 79.5,28.718 ccw(c79.49,28.718) 79.49,28.728 ccw(c79.49,28.718) 79.49,28.728 68.55,28.728 ccw(c68.55,25.478) 65.3,25.478 65.3,24.978 cw(c63.55,24.978) 63.55,23.228 61.2,23.228 cw(c61.2,24.978) 59.45,24.978 59.45,25.478 ccw(c56.2,25.478) 56.2,28.728 3,28.728 ccw(c3,25.478) -0.25,25.478 -0.25,2.978 ccw(c3,2.978) 2.862,-0.27 ccw(c2.9,-0.022) 2.9,-0.272 ccw(c2.9,-0.022) 2.9,-0.272 56.2,-0.272 ccw(c56.2,2.978) 59.45,2.978 59.45,3.478 cw(c61.201,3.477) 61.2,5.228 63.55,5.228 cw(c63.55,3.478) 65.3,3.478 65.3,2.978 ccw(c68.55,2.978) 68.55,-0.272 79.5,-0.272
GND on Top Layer "tg" (solid, remove dead copper, pour order 8): 79.15,-0.022 79.15,-0.122 155.032,-0.122 ccw(c156,2.718) 156,-0.282 ccw(c156,2.718) 159,2.718 159,8.968 158.75,8.968 cw(c158.75,9.968) 157.75,9.968 157.75,16.968 cw(c158.75,16.968) 158.75,17.968 159,17.968 159,25.718 ccw(c156,25.718) 156,28.718 79.15,28.718 68.52,28.728 ccw(c68.55,25.478) 65.3,25.478 65.3,24.978 cw(c63.55,24.978) 65.3,24.978 cw(c63.55,24.978) 63.55,23.228 cw(c63.55,24.978) 63.55,23.228 61.2,23.228 cw(c61.2,24.978) 59.45,24.978 59.45,25.478 ccw(c55.888,24.927) 56.631,28.454 1.816,28.505 ccw(c3,25.478) -0.25,25.478 -0.25,2.978 ccw(c3,2.978) 2.862,-0.27 ccw(c2.9,-0.023) 2.9,-0.272 ccw(c2.9,-0.023) 3.149,-0.023 ccw(c2.9,-0.023) 3.149,-0.022 57.451,-0.022 ccw(c56.2,2.978) 59.45,2.978 59.45,3.478 cw(c61.2,3.477) 61.2,5.228 63.55,5.228 cw(c63.55,3.478) 65.3,3.478 65.3,2.978 ccw(c68.55,2.978) 67.299,-0.022

## Other copper
Top Layer:
  rectangle net NetC9_2: 114.579,19.418 116.569,21.125
  rectangle net NetC9_2: 114.585,18.916 115.533,20.596
  rectangle net NetC9_2: 130.7,22.928 131.779,24.628
  rectangle net NetC42_1: 30.4,20.078 32.1,22.878
  rectangle net GND: 11.608,14.418 14.08,17.358
  rectangle net GND: 6.608,14.481 8.488,17.26
  rectangle net GND: 11.968,7.778 14.2,11.538
  rectangle net GND: 5.741,8.488 8.432,11.616
  rectangle net GND: 64.25,18.413 66.5,21.978
  rectangle net NetC40_2: 55.7,15.478 57.45,16.778
  rectangle net NetC42_2: 28.6,21.878 29.4,23.828
  rectangle net NetC48_1: 15.4,16.478 17,17.278
  rectangle net NetC48_2: 15.4,18.078 17.1,23.778
  rectangle net VCC_PWRAMP: 102.85,4.768 104.85,14.918
  region net NetC1_2: 104.55,17.968 101,17.968 101,16.468 104.55,16.468
  rectangle net NetC38_1: 92.05,16.468 96.5,17.968
  rectangle net NetC12_2: 141.35,22.868 143.25,24.668
  rectangle net OUT_BIAS: 95.25,4.868 98.55,7.268
  rectangle net VCC_PWRAMP: 102.85,4.768 106.45,7.168
  rectangle net NetC12_1: 144.05,22.918 145.222,24.628
  rectangle net GND: 49.925,22.728 55.251,24.628
  pour cut-out: 157.75,16.468 157.75,17.718 cw(c158.75,17.718) 158.75,18.718 159,18.718 159,16.468
  pour cut-out: 105.25,15.618 105.25,15.768 ccw(c104.55,15.768) 104.55,16.468 103.25,16.468 ccw(c103.25,15.468) 102.25,15.468
  pour cut-out: 24.7,6.03 24.7,8.378 25.5,9.178 26.929,7.748 26.929,6.03
  region net NetC9_2: 131,22.928 127.7,22.928 127.7,20.948 126.17,19.418 115.807,19.418 115.807,21.118 126,21.118 126,22.928 126,23.098 127.53,24.628 131,24.628
  region net NetC12_1: 152.129,23.088 152.129,22.918 152.129,15.068 155.75,15.068 155.75,13.368 152.129,13.368 151.959,13.368 150.429,14.898 150.429,15.068 150.429,22.918 145.2,22.918 145.2,24.618 150.599,24.618
  pour cut-out: 23.7,10.678 26.4,10.678 27.35,9.728 25.5,7.878 23.269,7.878
  pour cut-out: 23.7,13.778 26.25,13.778 26.525,14.053 26,14.578 24.6,14.578
  region net P3V3ADL: 19.65,11.378 20.45,10.578 22,10.578 22.6,9.978 22.6,8.378 18.7,8.378 18.6,8.478 19.65,9.528
  pour cut-out: 33.27,4.928 32.3,4.928 31.5,5.728 33,7.228 33.75,7.228
  pour cut-out: 16,3.278 16,6.278 16.05,6.228 17.65,6.228 17.65,3.218
  pour cut-out: 14.2,9.178 18.594,9.178 17.6,8.184 17.6,6.178 16,6.178 16,7.778 14.2,7.778
  pour cut-out: 14.2,14.178 14.2,11.178 16.2,11.178 17.6,12.578 17.6,13.429 16.851,14.178
  pour cut-out: 28.29,5.028 32.2,5.028 30,7.228
  pour cut-out: 18.065,22.528 18.065,26.828 20.75,26.828 20.8,26.878 20.8,22.528
  region net NetC40_2: 49.45,15.478 55.7,15.478 55.7,16.778 57.45,16.778 57.45,15.308 55.92,13.778 49.45,13.778 49.28,13.778 47.75,15.308 47.75,15.478 47.75,16.678 49.45,16.678
  region net VCC_PREAMP: 43,11.978 46.9,11.978 52.4,6.478 57.5,6.478 61,9.978 65.7,9.978 66.3,9.378 66.3,6.978 65.3,5.978 60,5.978 58.5,4.478 58.5,2.978 57,1.478 50.3,1.478 47,4.778 47,8.228 46.25,8.978 44.5,8.978 43,10.478
  region net NetIC9_6: 18.6,23.178 19.3,23.178 19.7,22.778 19.7,19.678 21.4,19.678 21.4,22.978 20.6,23.778 19.8,23.778
  region net NetC48_1: 17.9,15.578 17,16.478 17,17.278 15.5,17.262 15.4,15.878 16,15.278 17.8,15.278
  pour cut-out: 63.25,15.978 63.75,15.478 67.5,15.478 67.5,15.728 67.25,15.978
  pour cut-out: 30.6,26.378 30.6,24.378 30.7,24.278 31.1,24.678 31.1,26.278 30.8,26.578
  pour cut-out: 34.5,18.578 37.5,18.578 37.5,22.278 34.5,22.278
  pour cut-out: 88.65,18.43 91.45,18.43 91.45,15.706 88.65,15.706
  pour cut-out: 89.75,6.385 95.083,6.385 95.083,13.768 92.95,13.768 92.95,11.668 92.721,11.668 92.721,9.068 89.75,9.068
  text "ALIGN CONENCTORS" at 83.85,35.398 h2
  text "ALIGN CONENCTORS" at 26.4,34.798 h2
Bottom Layer:
  pour cut-out: 157.75,16.468 157.75,17.718 cw(c158.75,17.718) 158.75,18.718 159,18.718 159,16.468

## Silkscreen, mask and mechanical layers (free items; w line width, h text height)
Top Overlay:
  text "WUT 2022" at 78.65,19.928 h1
  text "Booster / Power / Stage / v1.5.2" at 75.978,6.742 h1.27
Bottom Overlay:
  rectangle: 118.05,3.961 120.15,7.461
  region: 126.84,4.968 126.84,10.568 118.388,10.568 118.388,4.968
  rectangle: 150.111,6.724 154.711,10.224
  rectangle: 125.759,-0.282 153.134,10.568
  rectangle: 85.45,0.583 112.825,8.683
  rectangle: 87.45,8.168 92.05,11.668
  rectangle: 27.05,15.278 31.65,18.778
  rectangle: 13.45,11.078 25.15,19.178
Top Solder:
  rectangle: 103.153,20.613 104.354,24.878
  rectangle: 92.749,20.334 93.95,25
  rectangle: 75.271,16.102 88.484,18.006
  rectangle: 48.06,20.426 49.206,21.627
  rectangle: 40.713,24.325 42.016,26.024
  rectangle: 12.697,25.059 15.075,26.903
  rectangle: 9.764,25.016 11.472,26.927
  region: 47.75,15.624 49.449,15.624 49.449,15.49 49.449,15.478 50.51,15.478 50.51,15.19 51.889,15.19 51.889,15.478 52.329,15.478 52.329,14.811 52.345,14.795 53.691,14.795 53.691,15.478 55.522,15.478 55.522,15.343 55.562,15.302 57.453,15.302 55.928,13.778 49.25,13.778 49.25,13.802 47.75,15.302
  lines w1.8: 4.7,13.878 4.7,17.278 7.2,19.778 7.2,22.978
Bottom Solder:
  rectangle: 78.5,-0.402 84.75,29.478
  rectangle: 145.75,9.968 159.75,30.218
  rectangle: 83.75,13.968 159.75,29.498
  rectangle: 113.25,-0.532 117.25,14.468
  rectangle: 154.279,-0.532 159.75,10.468
  rectangle: 116.55,-0.532 122.55,3.768
  rectangle: 23.343,14.917 26.534,18.678
  rectangle: 24.243,10.924 31.243,15.278
  rectangle: -0.757,0.478 13.243,29.478
  rectangle: -0.757,18.378 32.243,29.478
  rectangle: 30.743,-0.522 79.243,29.478
  rectangle: -0.757,-0.522 79.243,11.078
  region: 95,14.468 95,10.468 99,6.468 114.15,6.468 114.15,15.168 113.262,16.056
Mechanical 1:
  drawing of 221 lines, arcs and shapes, not listed
  text "Layer" at 16.458,58.452 h1.52
  text "Name" at 26.87,58.452 h1.52
  text "Material" at 50.486,58.452 h1.52
  text "Thickness" at 72.324,58.452 h1.52
  text "Constant" at 88.83,58.452 h1.52
  text "Board Layer Stack" at 103.304,58.452 h1.52
  text "Top Overlay" at 26.87,55.404 h1.52
  text "Top Solder" at 26.87,52.356 h1.52
  text "Solder Resist" at 50.486,52.356 h1.52
  text "3.5" at 88.83,52.356 h1.52
  text "1" at 16.458,49.308 h1.52
  text "Top Layer" at 26.87,49.308 h1.52
  text "0.036mm" at 72.324,49.308 h1.52
  text "Dielectric 1" at 26.87,46.26 h1.52
  text "FR408" at 50.486,46.26 h1.52
  text "1.000mm" at 72.324,46.26 h1.52
  text "3.67" at 88.83,46.26 h1.52
  text "2" at 16.458,43.212 h1.52
  text "Bottom Layer" at 26.87,43.212 h1.52
  text "0.036mm" at 72.324,43.212 h1.52
  text "Bottom Solder" at 26.87,40.164 h1.52
  text "Solder Resist" at 50.486,40.164 h1.52
  text "3.5" at 88.83,40.164 h1.52
  text "Bottom Overlay" at 26.87,37.116 h1.52